# Altium PCB main.PcbDoc (part 2 of 2)
Units mm, origin at the board's own origin, x right, y up, seen from the top; angles counter-clockwise.
Board outline 83 x 38 mm, 4 copper layers (Top Layer, Inner 1, Inner 2, Bottom Layer), stack 1.586 mm thick; 91 components, 60 nets, 272 pads, 642 vias.
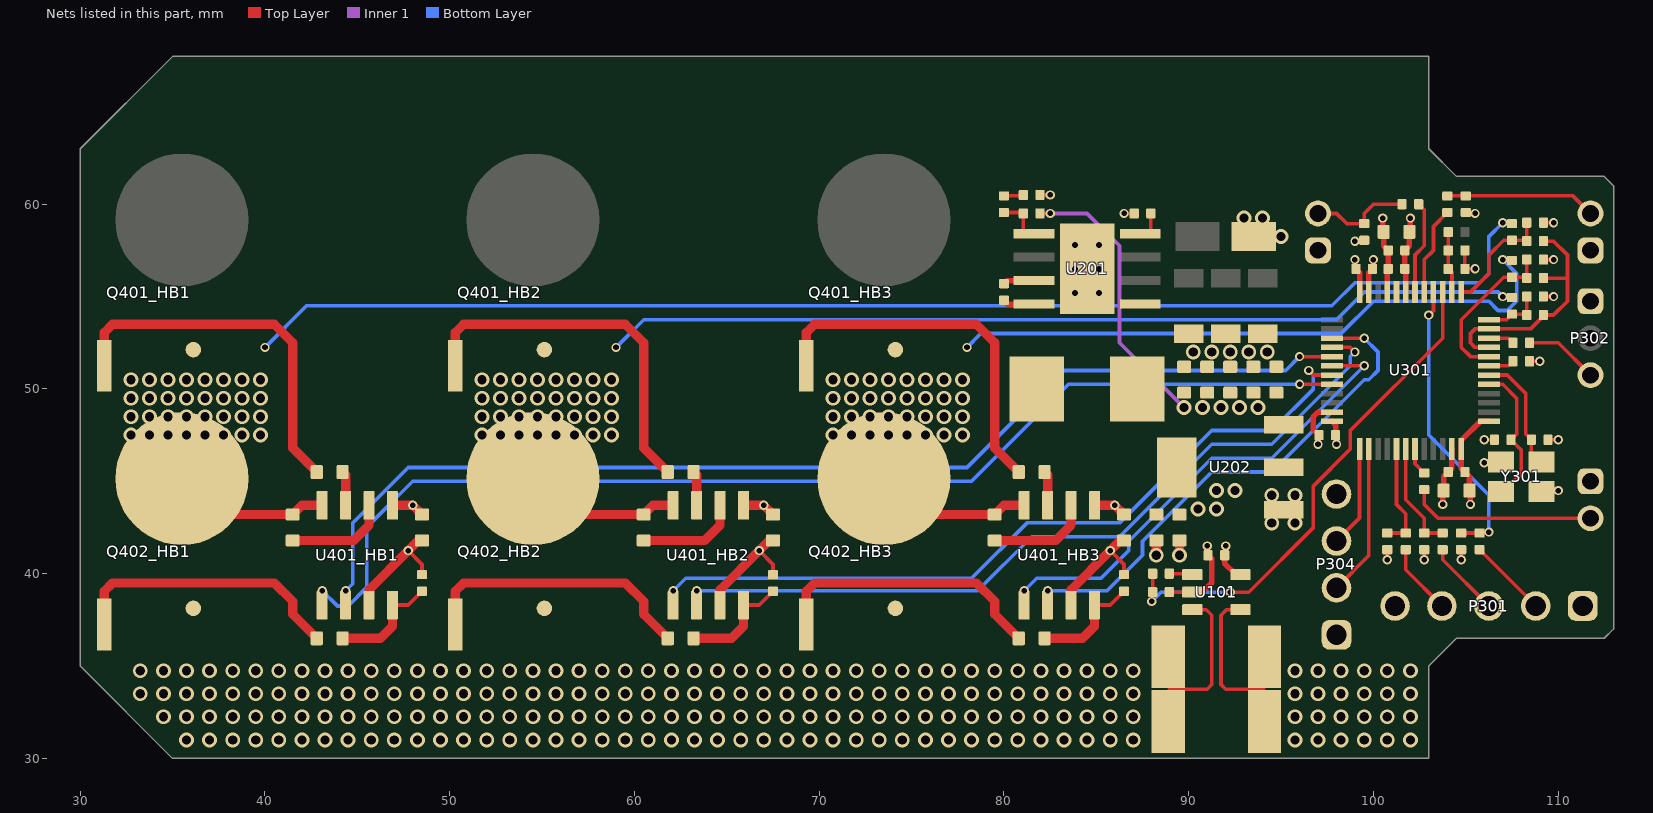
[diagram p4: the nets of this part, all layers, seen from the top]

## Via types
v1: diameter 0.8, hole 0.5, Top Layer to Bottom Layer, tented both sides, 580 vias
v2: diameter 0.5, hole 0.3, Top Layer to Bottom Layer, tented both sides, 56 vias
v3: diameter 0.63, hole 0.33, Top Layer to Bottom Layer, 6 vias

## Nets (pads, with @x,y where several pads share a name; then routed paths per layer and width w, separated by ;. In a path a pad name is that pad's centre, name@x,y a point inside that pad or via, vN(x,y) a via of type N, cw(c..) or ccw(c..) an arc to the next point about the centre after c; other vN are vias at no path point) (continued)
+BUCK: C202.1 C203.1 C204.1 C205.1 C209.1 C402_HB1.1 C402_HB2.1 C402_HB3.1 L201.2 R201.1 U202.3 U401_HB1.1 U401_HB2.1 U401_HB3.1 | length 20.6
  Top Layer w0.2: R201.1@81.95,59.5 v2(82.5,59.5)
  Top Layer w0.5: U401_HB1.1@46.905,43.7 v2(48,43.7) C402_HB1.1@48.5,43.2 ; U401_HB2.1@65.905,43.7 v2(67,43.7) C402_HB2.1@67.5,43.2 ; U401_HB3.1@84.905,43.7 v2(86,43.7) C402_HB3.1@86.5,43.2
  Inner 1 w0.2: v2(82.5,59.5) 84.5,59.5 86.25,57.75 86.25,52.5 v1(89.75,49)
  other v1: 90.75,49 91.75,49 92.75,49 93.75,49
+MCU: C101.1 C210.1 C211.1 C301.1 C302.1 C303.1 C304.1 C305.1 C306.1 C307.1 P301.5 P304.4 R301.1 R302.1 R303.1 R309.1 R311.1 U101.5 U202.2 U202.4 U301.1 U301.20 U301.21 U301.24 U301.36 U301.48 | length 17.7
  Top Layer w0.2: v2(99,58) 99.45,58 R311.1@99.5,58.05 ; v2(100.75,40.75) R301.1@100.75,41.3 ; v2(102.75,40.75) R302.1@102.75,41.3 ; v2(104.75,40.75) R303.1@104.75,41.3 ; R309.1@105,59.55 105.05,59.5 v2(105.5,59.5)
  Top Layer w0.3: v2(92,41.5) 92,41.05 C101.1@91.95,41 91.95,40.55 92.55,39.95 U101.5@92.8,39.95 ; U301.36@97.75,48.25 97.95,48.05 C303.1@97.95,47.5 98,47.45 v2(98,47) ; v2(99,57) 99,56.55 C302.1@99.05,56.5 99.25,56.3 U301.24@99.25,55.25 ; v2(100.5,59.25) 100.5,58.55 C305.1@100.55,58.5 100.55,57.75 C306.1@100.8,57.5 C307.1@100.8,56.5 100.75,56.45 U301.21@100.75,55.25 ; v2(105.25,43.75) 105.25,44.45 C301.1@105.2,44.5 105.2,45.25 C304.1@104.95,45.5 104.75,45.7 U301.48@104.75,46.75 104.75,47.2 105.8,48.25 U301.1@106.25,48.25
  other v1: 90.5,43.5 91.5,43.5 91.5,44.5 92.5,44.5
BEMF_A: R313.2 R314.1 R321.1 U301.8 | length 8.7
  Top Layer w0.2: U301.8@106.25,51.75 105.25,51.75 104.75,52.25 104.75,53.75 107.05,56.05 R314.1@107.5,56.05 108.25,56.05 R313.2@108.3,56 R321.1@108.3,57
BEMF_B: R315.2 R316.1 R320.1 U301.12 | length 3.2
  Top Layer w0.2: U301.12@106.25,53.75 107.2,53.75 R316.1@107.5,54.05 108.25,54.05 R315.2@108.3,54 R320.1@108.3,55
BEMF_C: R317.2 R318.1 R319.1 U301.13 | length 6.3
  Top Layer w0.2: U301.13@104.75,55.25 105.25,55.25 106.25,56.25 106.25,57.25 107.05,58.05 R318.1@107.5,58.05 108.25,58.05 R317.2@108.3,58 R319.1@108.3,59
BEMF_COM: R313.1 R315.1 R317.1 U301.9 U301.11 | length 13
  Top Layer w0.2: U301.9@106.25,52.25 105.5,52.25 105.25,52.5 105.25,53 105.5,53.25 U301.11@106.25,53.25 108.5,53.25 109.2,53.95 R315.1@109.2,54 109.75,54 110.5,54.75 110.5,56 ; R313.1@109.2,56 110.5,56 ; R317.1@109.2,58 109.75,58 110.5,57.25 110.5,56
BUCK_PH: C201.2 L201.1 U201.8 | length 1.7
  Top Layer w0.3: C201.2@80,54.8 80.205,54.595 U201.8@81.625,54.595
ESC_NRST: C310.1 U301.7 | length 1.4
  Top Layer w0.2: U301.7@106.25,51.25 107.3,51.25 C310.1@107.55,51.5
ESC_SIG_IN: P302.3 R307.1 | length 4
  Top Layer w0.2: R307.1@108.45,52.5 110,52.5 P302.3@111.75,50.75
ESC_TELEM: P303.2 R308.2 | length 10.1
  Top Layer w0.2: R308.2@102.75,44.55 102.75,43.75 103.5,43 P303.2@111.75,43
FB: R201.2 R203.1 U201.5 | length 2.7
  Top Layer w0.2: R203.1@80,59.55 81,59.55 R201.2@81.05,59.5 81.05,58.45 81.095,58.405 U201.5@81.625,58.405
GND: C101.2 C102.2 C103.2 C202.2 C203.2 C204.2 C205.2 C206.2 C207.2 C208.2 C209.2 C210.2 C211.2 C301.2 C302.2 C303.2 C304.2 C305.2 C306.2 C307.2 C308.2 C309.2 C310.2 D201.2 P301.1 P302.1 P303.1 P304.1 P305.1 P306.1 R101.2 R102.2 R105.2 R202.2 R204.2 R319.2 R320.2 R321.2 U101.2 U101.4 U201.1 U201.9 U202.1 U301.19 U301.23 U301.35 U301.47 Y301.2 Y301.4 | length 33.3
  Top Layer w0.2: R204.2@81.95,60.5 v2(82.5,60.5) ; v2(86.5,59.5) R202.2@87.05,59.5 ; C102.2@88.95,39 U101.2@90.2,39 ; U101.4@92.8,38.05 92.05,38.05 91.75,37.75 91.75,34 92,33.75 94.05,33.75 ; R105.2@104.95,57.5 C103.2@104.95,56.5 v2(105.5,56.5) ; v2(106,46) 106.05,46.05 Y301.4@106.9,46.05 ; v2(106,47.25) C308.2@106.55,47.25 ; C310.2@108.45,51.5 v2(109,51.5) ; Y301.2@109.1,44.45 109.95,44.45 v2(110,44.5) ; R320.2@109.2,55 v2(109.75,55) ; R321.2@109.2,57 v2(109.75,57) ; R319.2@109.2,59 v2(109.75,59) ; C309.2@109.45,47.25 v2(110,47.25)
  Top Layer w0.3: U101.2@90.2,39 90.75,39 91.25,39.5 91.25,40.8 C101.2@91.05,41 91,41.05 v2(91,41.5) ; v2(97,47) 97,47.45 C303.2@97.05,47.5 96.75,47.8 96.75,48.5 97,48.75 U301.35@97.75,48.75 ; U301.23@99.75,55.25 99.75,56.3 C302.2@99.95,56.5 100,56.55 v2(100,57) ; U301.19@101.75,55.25 101.75,56.45 C307.2@101.7,56.5 C306.2@101.7,57.5 101.95,57.75 C305.2@101.95,58.5 102,58.55 v2(102,59.25) ; v2(103.75,43.75) 103.75,44.45 C301.2@103.8,44.5 103.8,45.25 C304.2@104.05,45.5 104.25,45.7 U301.47@104.25,46.75
  Top Layer w0.5: v1(88.25,41) C210.2@88.25,41.8 ; v1(89.5,41) C211.2@89.5,41.8
  other v1: 95.75,31 97,31 98.25,31 99.5,31 100.75,31 102,31 95.75,32.25 97,32.25 98.25,32.25 99.5,32.25 100.75,32.25 102,32.25 95.75,33.5 97,33.5 98.25,33.5 99.5,33.5 100.75,33.5 102,33.5 95.75,34.75 97,34.75 98.25,34.75 99.5,34.75 100.75,34.75 102,34.75 94.5,42.75 95.75,42.75 94.5,44.25 95.75,44.25 90.25,52 91.25,52 92.25,52 93.25,52 94.25,52 95,58.25 93,59.25 94,59.25
  other v3: 83.85,55.2 85.15,55.2 83.85,56.5 85.15,56.5 83.85,57.8 85.15,57.8
HALL_A: P301.4 R304.2 | length 3.9
  Top Layer w0.2: R304.2@101.75,41.3 101.75,40.21 P301.4@103.71,38.25
HALL_B: P301.3 R305.2 | length 4.1
  Top Layer w0.2: R305.2@103.75,41.3 103.75,40.75 P301.3@106.25,38.25
HALL_C: P301.2 R306.2 | length 4.3
  Top Layer w0.2: R306.2@105.75,41.3 108.79,38.26 P301.2@108.79,38.25
HO_HB1: R401_HB1.1 U401_HB1.3 | length 1.9
  Top Layer w0.5: R401_HB1.1@44.2,45.5 44.365,45.335 U401_HB1.3@44.365,43.7
HO_HB2: R401_HB2.1 U401_HB2.3 | length 1.9
  Top Layer w0.5: R401_HB2.1@63.2,45.5 63.365,45.335 U401_HB2.3@63.365,43.7
HO_HB3: R401_HB3.1 U401_HB3.3 | length 1.9
  Top Layer w0.5: R401_HB3.1@82.2,45.5 82.365,45.335 U401_HB3.3@82.365,43.7
HOG_HB1: Q401_HB1.1 R401_HB1.2 | length 20.1
  Top Layer w0.5: Q401_HB1.1@31.3,51.25 31.3,53.05 31.75,53.5 40.5,53.5 41.5,52.5 41.5,46.8 R401_HB1.2@42.8,45.5
HOG_HB2: Q401_HB2.1 R401_HB2.2 | length 20.1
  Top Layer w0.5: Q401_HB2.1@50.3,51.25 50.3,53.05 50.75,53.5 59.5,53.5 60.5,52.5 60.5,46.8 R401_HB2.2@61.8,45.5
HOG_HB3: Q401_HB3.1 R401_HB3.2 | length 20.1
  Top Layer w0.5: Q401_HB3.1@69.3,51.25 69.3,53.05 69.75,53.5 78.5,53.5 79.5,52.5 79.5,46.8 R401_HB3.2@80.8,45.5
HSE_IN: C308.1 U301.5 Y301.1 | length 7.7
  Top Layer w0.2: U301.5@106.25,50.25 107,50.25 107.75,49.5 107.75,47.55 C308.1@107.45,47.25 108,46.7 108,45.425 107.025,44.45 Y301.1@106.9,44.45
HSE_OUT: C309.1 U301.6 Y301.3 | length 6.5
  Top Layer w0.2: U301.6@106.25,50.75 107.25,50.75 108.25,49.75 108.25,47.55 C309.1@108.55,47.25 108.55,46.6 Y301.3@109.1,46.05
I_SENSE: C102.1 R103.2 U301.15 | length 27.6
  Top Layer w0.2: v2(88,38.5) 88.05,38.55 C102.1@88.05,39 R103.2@88.05,40 ; v2(92.25,39) 93.25,39 96.75,42.5 96.75,44.75 98.75,46.75 98.75,47.75 103.75,52.75 U301.15@103.75,55.25
  Bottom Layer w0.2: v2(88,38.5) 88.5,39 v2(92.25,39)
LO_HB1: R402_HB1.1 R403_HB1.1 U401_HB1.8 | length 6
  Top Layer w0.2: U401_HB1.8@46.905,38.3 47.75,38.3 R403_HB1.1@48.5,39.05
  Top Layer w0.5: R402_HB1.1@44.2,36.5 46.25,36.5 46.905,37.155 U401_HB1.8@46.905,38.3
LO_HB2: R402_HB2.1 R403_HB2.1 U401_HB2.8 | length 6
  Top Layer w0.2: U401_HB2.8@65.905,38.3 66.75,38.3 R403_HB2.1@67.5,39.05
  Top Layer w0.5: R402_HB2.1@63.2,36.5 65.25,36.5 65.905,37.155 U401_HB2.8@65.905,38.3
LO_HB3: R402_HB3.1 R403_HB3.1 U401_HB3.8 | length 6
  Top Layer w0.2: U401_HB3.8@84.905,38.3 85.75,38.3 R403_HB3.1@86.5,39.05
  Top Layer w0.5: R402_HB3.1@82.2,36.5 84.25,36.5 84.905,37.155 U401_HB3.8@84.905,38.3
LOG_HB1: Q402_HB1.1 R402_HB1.2 | length 15.1
  Top Layer w0.5: Q402_HB1.1@31.3,37.25 31.3,39.05 31.75,39.5 40.5,39.5 41.5,38.5 41.5,37.8 R402_HB1.2@42.8,36.5
LOG_HB2: Q402_HB2.1 R402_HB2.2 | length 15.1
  Top Layer w0.5: Q402_HB2.1@50.3,37.25 50.3,39.05 50.75,39.5 59.5,39.5 60.5,38.5 60.5,37.8 R402_HB2.2@61.8,36.5
LOG_HB3: Q402_HB3.1 R402_HB3.2 | length 15.1
  Top Layer w0.5: Q402_HB3.1@69.3,37.25 69.3,39.05 69.75,39.5 78.5,39.5 79.5,38.5 79.5,37.8 R402_HB3.2@80.8,36.5
NetC201_1: C201.1 U201.7 | length 1.7
  Top Layer w0.3: C201.1@80,55.7 80.165,55.865 U201.7@81.625,55.865
NetC401_HB1_1: C401_HB1.1 U401_HB1.2 | length 5.5
  Top Layer w0.5: C401_HB1.1@41.5,41.8 44.8,41.8 45.635,42.635 U401_HB1.2@45.635,43.7
NetC401_HB2_1: C401_HB2.1 U401_HB2.2 | length 5.5
  Top Layer w0.5: C401_HB2.1@60.5,41.8 63.8,41.8 64.635,42.635 U401_HB2.2@64.635,43.7
NetC401_HB3_1: C401_HB3.1 U401_HB3.2 | length 5.5
  Top Layer w0.5: C401_HB3.1@79.5,41.8 82.8,41.8 83.635,42.635 U401_HB3.2@83.635,43.7
NetR103_1: R103.1 U101.1 | length 1.3
  Top Layer w0.2: R103.1@88.95,40 90.15,40 U101.1@90.2,39.95
NetR202_1: R202.1 U201.4 | length 1.6
  Top Layer w0.2: U201.4@87.375,58.405 87.905,58.405 87.95,58.45 R202.1@87.95,59.5
NetR203_2: R203.2 R204.1 | length 1.1
  Top Layer w0.2: R203.2@80,60.45 81,60.45 R204.1@81.05,60.5
NTC1: P305.2 R309.2 R310.2 | length 8.1
  Top Layer w0.2: R310.2@104,60.45 R309.2@105,60.45 110.8,60.45 P305.2@111.75,59.5
NTC2: P306.2 R311.2 R312.2 | length 5.5
  Top Layer w0.2: P306.2@97,59.5 98,59.5 98.55,58.95 R311.2@99.5,58.95 99.5,59.5 100,60 R312.2@101.55,60
PA2: R307.2 U301.10 | length 1.4
  Top Layer w0.2: U301.10@106.25,52.75 107.3,52.75 R307.2@107.55,52.5
PB0: R303.2 R306.1 U301.16 | length 16
  Top Layer w0.2: v2(103,54) 103.25,54.25 U301.16@103.25,55.25 ; R303.2@104.75,42.2 R306.1@105.75,42.2 106.2,42.2 v2(106.25,42.25)
  Bottom Layer w0.2: v2(103,54) 103,47.5 106.25,44.25 v2(106.25,42.25)
PB1: R310.1 U301.17 | length 4.8
  Top Layer w0.2: U301.17@102.75,55.25 102.75,57 103.25,57.5 103.25,58.8 R310.1@104,59.55
PB2: R312.1 U301.18 | length 5.1
  Top Layer w0.2: U301.18@102.25,55.25 102.25,57.25 102.75,57.75 102.75,59.7 R312.1@102.45,60
PB4: R301.2 R304.1 U301.41 | length 5.8
  Top Layer w0.2: R301.2@100.75,42.2 R304.1@101.75,42.2 101.75,43.25 101.25,43.75 U301.41@101.25,46.75
PB5: R302.2 R305.1 U301.42 | length 6
  Top Layer w0.2: U301.42@101.75,46.75 101.75,44 102.75,43 R302.2@102.75,42.2 R305.1@103.75,42.2
PB6: R308.1 U301.43 | length 1.5
  Top Layer w0.2: U301.43@102.25,46.75 102.25,45.95 R308.1@102.75,45.45
PHASE_A: C401_HB3.2 Q401_HB3.2-3-4-5-6-7-8 Q402_HB3.9 R314.2 U401_HB3.4 | length 42.9
  Top Layer w0.2: v2(107,57) 107.05,56.95 R314.2@107.5,56.95
  Top Layer w0.5: Q402_HB3.9@73.5,45.15 75.45,43.2 C401_HB3.2@79.5,43.2 80,43.7 U401_HB3.4@81.095,43.7
  Bottom Layer w0.2: v2(78,52.25) 78.75,53 98.25,53 100,54.75 106.25,54.75 106.75,54.25 107.25,54.25 107.75,54.75 107.75,56.25 v2(107,57)
  other v1: 70.75,47.5 71.75,47.5 72.75,47.5 73.75,47.5 74.75,47.5 75.75,47.5 76.75,47.5 77.75,47.5 70.75,48.5 71.75,48.5 72.75,48.5 73.75,48.5 74.75,48.5 75.75,48.5 76.75,48.5 77.75,48.5 70.75,49.5 71.75,49.5 72.75,49.5 73.75,49.5 74.75,49.5 75.75,49.5 76.75,49.5 77.75,49.5 70.75,50.5 71.75,50.5 72.75,50.5 73.75,50.5 74.75,50.5 75.75,50.5 76.75,50.5 77.75,50.5
PHASE_B: C401_HB2.2 Q401_HB2.2-3-4-5-6-7-8 Q402_HB2.9 R316.2 U401_HB2.4 | length 58.5
  Top Layer w0.2: v2(107,55) 107.05,54.95 R316.2@107.5,54.95
  Top Layer w0.5: Q402_HB2.9@54.5,45.15 56.45,43.2 C401_HB2.2@60.5,43.2 61,43.7 U401_HB2.4@62.095,43.7
  Bottom Layer w0.2: v2(59,52.25) 60.5,53.75 98,53.75 99.5,55.25 106.75,55.25 v2(107,55)
  other v1: 51.75,47.5 52.75,47.5 53.75,47.5 54.75,47.5 55.75,47.5 56.75,47.5 57.75,47.5 58.75,47.5 51.75,48.5 52.75,48.5 53.75,48.5 54.75,48.5 55.75,48.5 56.75,48.5 57.75,48.5 58.75,48.5 51.75,49.5 52.75,49.5 53.75,49.5 54.75,49.5 55.75,49.5 56.75,49.5 57.75,49.5 58.75,49.5 51.75,50.5 52.75,50.5 53.75,50.5 54.75,50.5 55.75,50.5 56.75,50.5 57.75,50.5 58.75,50.5
PHASE_C: C401_HB1.2 Q401_HB1.2-3-4-5-6-7-8 Q402_HB1.9 R318.2 U401_HB1.4 | length 80.3
  Top Layer w0.2: v2(107,59) 107.05,58.95 R318.2@107.5,58.95
  Top Layer w0.5: Q402_HB1.9@35.5,45.15 37.45,43.2 C401_HB1.2@41.5,43.2 42,43.7 U401_HB1.4@43.095,43.7
  Bottom Layer w0.2: v2(40,52.25) 42.25,54.5 83.25,54.5 83.5,54.25 85.5,54.25 85.75,54.5 97.75,54.5 99,55.75 105.75,55.75 106.25,56.25 106.25,58.25 v2(107,59)
  other v1: 32.75,47.5 33.75,47.5 34.75,47.5 35.75,47.5 36.75,47.5 37.75,47.5 38.75,47.5 39.75,47.5 32.75,48.5 33.75,48.5 34.75,48.5 35.75,48.5 36.75,48.5 37.75,48.5 38.75,48.5 39.75,48.5 32.75,49.5 33.75,49.5 34.75,49.5 35.75,49.5 36.75,49.5 37.75,49.5 38.75,49.5 39.75,49.5 32.75,50.5 33.75,50.5 34.75,50.5 35.75,50.5 36.75,50.5 37.75,50.5 38.75,50.5 39.75,50.5
PWM_H_A: U301.30 U401_HB3.5 | length 25.5
  Top Layer w0.2: U301.30@97.75,51.25 v2(99.5,51.25)
  Bottom Layer w0.2: v2(81.095,39.075) 81.77,39.75 85.25,39.75 86.75,41.25 86.75,41.75 91.25,46.25 94.5,46.25 v2(99.5,51.25)
PWM_H_B: U301.31 U401_HB2.5 | length 41.6
  Top Layer w0.2: v2(96.5,51) 96.75,50.75 U301.31@97.75,50.75
  Bottom Layer w0.2: v2(62.095,39.075) 62.77,39.75 78.25,39.75 81.25,42.75 86.25,42.75 91.25,47.75 94.5,47.75 96.75,50 96.75,50.75 v2(96.5,51)
PWM_H_C: U301.32 U401_HB1.5 | length 61.9
  Top Layer w0.2: v2(96,50.25) U301.32@97.75,50.25
  Bottom Layer w0.2: v2(43.095,39.075) 43.92,38.25 44.5,38.25 45.5,39.25 45.5,42.5 48,45 78.25,45 83.5,50.25 v2(96,50.25)
PWM_L_A: U301.27 U401_HB3.6 | length 27.1
  Top Layer w0.2: U301.27@97.75,52.75 v2(99.5,52.75)
  Bottom Layer w0.2: v2(82.365,39.075) 85.575,39.075 87.5,41 87.5,41.75 91.25,45.5 94.5,45.5 99.5,50.5 99.75,50.5 100.25,51 100.25,52 v2(99.5,52.75)
PWM_L_B: U301.28 U401_HB2.6 | length 42.6
  Top Layer w0.2: U301.28@97.75,52.25 98.75,52.25 v2(99,52)
  Bottom Layer w0.2: v2(63.365,39.075) 78.575,39.075 81.5,42 86.25,42 91.25,47 94.5,47 98.75,51.25 98.75,51.75 v2(99,52)
PWM_L_C: U301.29 U401_HB1.6 | length 60.6
  Top Layer w0.2: v2(96,51.75) U301.29@97.75,51.75
  Bottom Layer w0.2: v2(44.365,39.075) 44.75,39.46 44.75,42.75 47.75,45.75 78,45.75 83.25,51 95.25,51 v2(96,51.75)
SWCLK: P304.2 U301.38 | length 8.2
  Top Layer w0.2: P304.2@98,39.23 99.75,40.98 U301.38@99.75,46.75
SWDIO: P304.3 U301.37 | length 5.5
  Top Layer w0.2: P304.3@98,41.77 99.25,43.02 U301.37@99.25,46.75
V_SENSE: C103.1 R104.1 R105.1 U301.14 | length 3.3
  Top Layer w0.2: R104.1@104.05,58.5 R105.1@104.05,57.5 C103.1@104.05,56.5 104.25,56.3 U301.14@104.25,55.25
VSS: C402_HB1.2 C402_HB2.2 C402_HB3.2 Q402_HB1.2-3-4-5-6-7-8 Q402_HB2.2-3-4-5-6-7-8 Q402_HB3.2-3-4-5-6-7-8 R101.1 R102.1 R403_HB1.2 R403_HB2.2 R403_HB3.2 U101.3 U401_HB1.7 U401_HB2.7 U401_HB3.7 | length 26.6
  Top Layer w0.2: v2(47.75,41.25) 48.5,40.5 R403_HB1.2@48.5,39.95 ; v2(66.75,41.25) 67.5,40.5 R403_HB2.2@67.5,39.95 ; v2(85.75,41.25) 86.5,40.5 R403_HB3.2@86.5,39.95 ; 88.95,33.75 91,33.75 91.25,34 91.25,37.75 90.95,38.05 U101.3@90.2,38.05
  Top Layer w0.5: U401_HB1.7@45.635,38.3 45.635,39.135 v2(47.75,41.25) 48.3,41.8 C402_HB1.2@48.5,41.8 ; U401_HB2.7@64.635,38.3 64.635,39.135 v2(66.75,41.25) 67.3,41.8 C402_HB2.2@67.5,41.8 ; U401_HB3.7@83.635,38.3 83.635,39.135 v2(85.75,41.25) 86.3,41.8 C402_HB3.2@86.5,41.8
  other v1: 35.75,31 37,31 38.25,31 39.5,31 40.75,31 42,31 43.25,31 44.5,31 45.75,31 47,31 48.25,31 49.5,31 50.75,31 52,31 53.25,31 54.5,31 55.75,31 57,31 58.25,31 59.5,31 60.75,31 62,31 63.25,31 64.5,31 65.75,31 67,31 68.25,31 69.5,31 70.75,31 72,31 73.25,31 74.5,31 75.75,31 77,31 78.25,31 79.5,31 80.75,31 82,31 83.25,31 84.5,31 85.75,31 87,31 34.5,32.25 35.75,32.25 37,32.25 38.25,32.25 39.5,32.25 40.75,32.25 42,32.25 43.25,32.25 44.5,32.25 45.75,32.25 47,32.25 48.25,32.25 49.5,32.25 50.75,32.25 52,32.25 53.25,32.25 54.5,32.25 55.75,32.25 57,32.25 58.25,32.25 59.5,32.25 60.75,32.25 62,32.25 63.25,32.25 64.5,32.25 65.75,32.25 67,32.25 68.25,32.25 69.5,32.25 70.75,32.25 72,32.25 73.25,32.25 74.5,32.25 75.75,32.25 77,32.25 78.25,32.25 79.5,32.25 80.75,32.25 82,32.25 83.25,32.25 84.5,32.25 85.75,32.25 87,32.25 33.25,33.5 34.5,33.5 35.75,33.5 37,33.5 38.25,33.5 39.5,33.5 40.75,33.5 42,33.5 43.25,33.5 44.5,33.5 45.75,33.5 47,33.5 48.25,33.5 49.5,33.5 50.75,33.5 52,33.5 53.25,33.5 54.5,33.5 55.75,33.5 57,33.5 58.25,33.5 59.5,33.5 60.75,33.5 62,33.5 63.25,33.5 64.5,33.5 65.75,33.5 67,33.5 68.25,33.5 69.5,33.5 70.75,33.5 72,33.5 73.25,33.5 74.5,33.5 75.75,33.5 77,33.5 78.25,33.5 79.5,33.5 80.75,33.5 82,33.5 83.25,33.5 84.5,33.5 85.75,33.5 87,33.5 33.25,34.75 34.5,34.75 35.75,34.75 37,34.75 38.25,34.75 39.5,34.75 40.75,34.75 42,34.75 43.25,34.75 44.5,34.75 45.75,34.75 47,34.75 48.25,34.75 49.5,34.75 50.75,34.75 52,34.75 53.25,34.75 54.5,34.75 55.75,34.75 57,34.75 58.25,34.75 59.5,34.75 60.75,34.75 62,34.75 63.25,34.75 64.5,34.75 65.75,34.75 67,34.75 68.25,34.75 69.5,34.75 70.75,34.75 72,34.75 73.25,34.75 74.5,34.75 75.75,34.75 77,34.75 78.25,34.75 79.5,34.75 80.75,34.75 82,34.75 83.25,34.75 84.5,34.75 85.75,34.75 87,34.75
pads on no net: P302.2 U201.6 U301.2 U301.3 U301.4 U301.22 U301.25 U301.26 U301.33 U301.34 U301.39 U301.40 U301.44 U301.45 U301.46

## Polygon pours and split planes (outlines as drawn)
+BATT on Top Layer "NONET_L01_P-001" (solid, remove dead copper, pour order 16): 30.45,55.15 78.55,55.15 78.55,60.55 79.5,61.5 103,61.5 103,68 30.45,68
GND on Top Layer "NONET_L01_P-001" (solid, remove dead copper, pour order 19): 93.2,37.2 95,37.2 95.8,38 103,38 103,30 93.2,30
GND on Top Layer "NONET_L01_P-001" (solid, remove dead copper, pour order 18): 92.325,59.075 93,59.75 94,59.75 95.25,58.5 95.25,58 94.725,57.475 92.325,57.475
VSS on Top Layer "NONET_L01_P-001" (solid, remove dead copper, pour order 17): 32.1,38.65 32.1,30 89.8,30 89.8,37.2 86.45,37.2 84.75,35.5 80,35.5 78.1,37.4 78.1,38.65 70.1,38.65 70.1,35.6 69.75,35.25 61.25,35.25 59.1,37.4 59.1,38.65 51.1,38.65 51.1,35.6 50.75,35.25 42.25,35.25 40.1,37.4 40.1,38.65
GND on Top Layer "NONET_L04_P-001" (solid, remove dead copper, pour order 9): 94.075,44.325 94.5,44.75 95.75,44.75 96.225,44.275 96.225,42.725 95.75,42.25 94.5,42.25 94.075,42.675 94.075,42.975
+MCU on Top Layer "NONET_L04_P-001" (solid, remove dead copper, pour order 8): 88.25,42.87 91.67,42.87 94.075,45.275 96.225,45.275 96.225,46.225 94.025,46.225 92.875,47.375 88.275,47.375 87.87,46.97 87.87,43.2
PHASE_C on Top Layer "NONET_L04_P-001" (solid, remove dead copper, pour order 7): 32.1,52.65 32.1,49.35 31.9,49.15 30.45,49.15 30.45,41.15 40.55,41.15 40.55,52.2 40.1,52.65
PHASE_B on Top Layer "NONET_L04_P-001" (solid, remove dead copper, pour order 6): 51.1,52.65 51.1,49.35 50.9,49.15 49.45,49.15 49.45,41.15 59.55,41.15 59.55,52.2 59.1,52.65
PHASE_A on Top Layer "NONET_L04_P-001" (solid, remove dead copper, pour order 5): 70.1,52.65 70.1,49.35 69.9,49.15 68.45,49.15 68.45,41.15 78.55,41.15 78.55,52.2 78.1,52.65
+BATT on Top Layer "NONET_L04_P-001" (solid, remove dead copper, pour order 4): 86.275,55.615 86.39,55.5 94.8,55.5 94.8,56.5 92.625,56.5 91.675,57.45 91.675,59.025 89.275,59.025 89.275,58.185 88.475,57.385 86.275,57.385
+BUCK on Top Layer "NONET_L04_P-001" (solid, remove dead copper, pour order 3): 85.75,51.75 88.7,51.75 88.7,50.8 89.37,50.13 94.75,50.13 96.225,48.655 96.225,47.575 94.075,47.575 93.4,48.25 85.75,48.25
GND on Top Layer "NONET_L04_P-001" (solid, remove dead copper, pour order 2): 85.975,58.95 85.975,55.145 86.275,54.845 93.455,54.845 95.13,53.17 95.13,51.2 94.8,50.87 89.7,50.87 89.37,51.2 89.37,52.33 88.95,52.75 84.325,52.75 83.025,54.05 83.025,58.95
BUCK_PH on Top Layer "NONET_L04_P-001" (solid, remove dead copper, pour order 1): 80.525,54.845 80.525,51.975 80.3,51.75 80.3,48.25 83.25,48.25 83.25,51.75 82.725,52.275 82.725,54.845
+MCU on Top Layer "NONET_L01_P-001" (solid, remove dead copper, pour order 0): 101.4,54.65 100.6,54.65 100.6,55.85 101.4,55.85
no net on Top Overlay "NONET_L01_P-001" (solid): 109,50.75 110.25,51.5 110.25,50
no net on Top Overlay "NONET_L01_P-001" (solid): 110.25,43 109,43.75 109,42.25
VSS on Bottom Layer "NONET_L01_P-001" (solid, remove dead copper, pour order 26): 30,42 30,30 87.5,30 87.5,42
+MCU on Bottom Layer "NONET_L01_P-001" (solid, remove dead copper, pour order 15): 91.25,45 90,43.75 90,41.25 93,38.25 114.5,38.25 114.5,61 101,61 98.5,58.5 98.5,48.25 95.25,45
GND on Bottom Layer "NONET_L01_P-001" (solid, remove dead copper, pour order 34): 83.5,55 83.75,54.75 85.25,54.75 85.5,55 85.5,58 85.25,58.25 83.75,58.25 83.5,58
+BATT on Bottom Layer "Bottom Layer-+BATT" (solid, remove dead copper, pour order 33): 89,56.5 91.5,56.5 91.75,56.75 91.75,60.75 92.5,61.5 103,61.5 103,68 30.45,68 30.45,55.15 75.65,55.15 82,61.5 88,61.5 88.75,60.75 88.75,56.75
GND on Bottom Layer "NONET_L01_P-001" (solid, remove dead copper, pour order 31): 95.25,38 103,38 103,30 95.25,30
PHASE_C on Bottom Layer "NONET_L01_P-001" (solid, remove dead copper, pour order 13): 32.25,50.5 33.25,51.5 39.25,51.5 40.25,50.5 40.25,47.5 39.25,46.5 33.25,46.5 32.25,47.5
PHASE_B on Bottom Layer "NONET_L01_P-001" (solid, remove dead copper, pour order 12): 51.25,50.5 52.25,51.5 58.25,51.5 59.25,50.5 59.25,47.5 58.25,46.5 52.25,46.5 51.25,47.5
PHASE_A on Bottom Layer "NONET_L01_P-001" (solid, remove dead copper, pour order 11): 70.25,50.5 71.25,51.5 77.25,51.5 78.25,50.5 78.25,47.5 77.25,46.5 71.25,46.5 70.25,47.5
+BUCK on Bottom Layer "NONET_L01_P-001" (solid, remove dead copper, pour order 10): 93.75,49.75 94.25,49.25 94.25,48.75 93.75,48.25 91,48.25 86,43.25 81,43.25 80.25,42.5 48.75,42.5 47.75,43.5 47.75,44 48.25,44.5 78.75,44.5 84,49.75
GND on Bottom Solder "NONET_L01_P-001" (solid): 83.5,55 83.75,54.75 85.25,54.75 85.5,55 85.5,58 85.25,58.25 83.75,58.25 83.5,58
no net on Bottom Solder "NONET_L01_P-001" (solid): 32.75,35.25 32.75,33 35.25,30.5 87.5,30.5 87.5,35.25
no net on Bottom Solder "NONET_L01_P-001" (solid): 102.5,35.25 102.5,30.5 95.25,30.5 95.25,35.25
no net on Bottom Solder "NONET_L01_P-001" (solid): 102.5,67.5 102.5,62.75 32.75,62.75 32.75,65 35.25,67.5
PHASE_C on Bottom Solder "NONET_L01_P-001" (solid): 32.25,50.5 33.25,51.5 39.25,51.5 40.25,50.5 40.25,47.5 39.25,46.5 33.25,46.5 32.25,47.5
PHASE_B on Bottom Solder "NONET_L01_P-001" (solid): 51.25,50.5 52.25,51.5 58.25,51.5 59.25,50.5 59.25,47.5 58.25,46.5 52.25,46.5 51.25,47.5
PHASE_A on Bottom Solder "NONET_L01_P-001" (solid): 70.25,50.5 71.25,51.5 77.25,51.5 78.25,50.5 78.25,47.5 77.25,46.5 71.25,46.5 70.25,47.5
GND on Inner 1 "NONET_L01_P-001" (solid, remove dead copper, pour order 20): 87.75,30 87.75,41.75 30,41.75 30,61 113,61 113,30
+BATT on Inner 1 "NONET_L01_P-001" (solid, remove dead copper, pour order 28): 113,68 113,61.5 30,61.5 30,68
VSS on Inner 1 "NONET_L01_P-001" (solid, remove dead copper, pour order 24): 30,41.5 30,30 87.5,30 87.5,41.5
GND on Inner 2 "NONET_L01_P-001" (solid, remove dead copper, pour order 23): 87.75,30 87.75,37.75 30,37.75 30,61 113,61 113,30
+BATT on Inner 2 "NONET_L01_P-001" (solid, remove dead copper, pour order 30): 113,68 113,61.5 30,61.5 30,68
VSS on Inner 2 "NONET_L01_P-001" (solid, remove dead copper, pour order 25): 30,37.5 30,30 87.5,30 87.5,37.5
no net on Top Solder "NONET_L01_P-001" (solid): 102.5,67.5 102.5,62.75 32.75,62.75 32.75,65 35.25,67.5
no net on Top Solder "NONET_L01_P-001" (solid): 102.5,35.25 102.5,30.5 95.25,30.5 95.25,35.25
no net on Top Solder "NONET_L01_P-001" (solid): 32.75,35.25 32.75,33 35.25,30.5 87.5,30.5 87.5,35.25

## Silkscreen, mask and mechanical layers (free items; w line width, h text height)
Top Overlay:
  text "+" at 98.373,59.806 h5
Bottom Overlay:
  text "+" at 98.373,59.806 h5
  text "NTC1" at 110.317,58.985 h2
  text "NTC2" at 95.567,58.918 h2
  text "INPUT" at 110.35,50.168 h2
  text "V  D C  G" at 96.333,44.772 h2 r90
  text "C" at 37.333,44.127 h3
  text "B" at 56.306,44.127 h3
  text "A" at 75.341,44.127 h3
  text "TELEM" at 110.25,42.418 h2
  text "G  C B A  V" at 111.613,39.917 h2
  text "12S ESC" at 88.067,37.47 h4
  text "CRLS DSGN" at 94.637,31.469 h2
Mechanical 1:
  the board outline again, w0.1